# Altium PCB PCB1.PcbDoc
Units mm, origin at the board's own origin, x right, y up, seen from the top; angles counter-clockwise.
Board outline 83.06 x 101.6 mm, 4 copper layers (Top Layer, Layer 1, Layer 2, Bottom Layer), stack 0.603 mm thick; 75 components, 37 nets, 224 pads, 59 vias.
Unrouted connection lines stored in the file: 11.
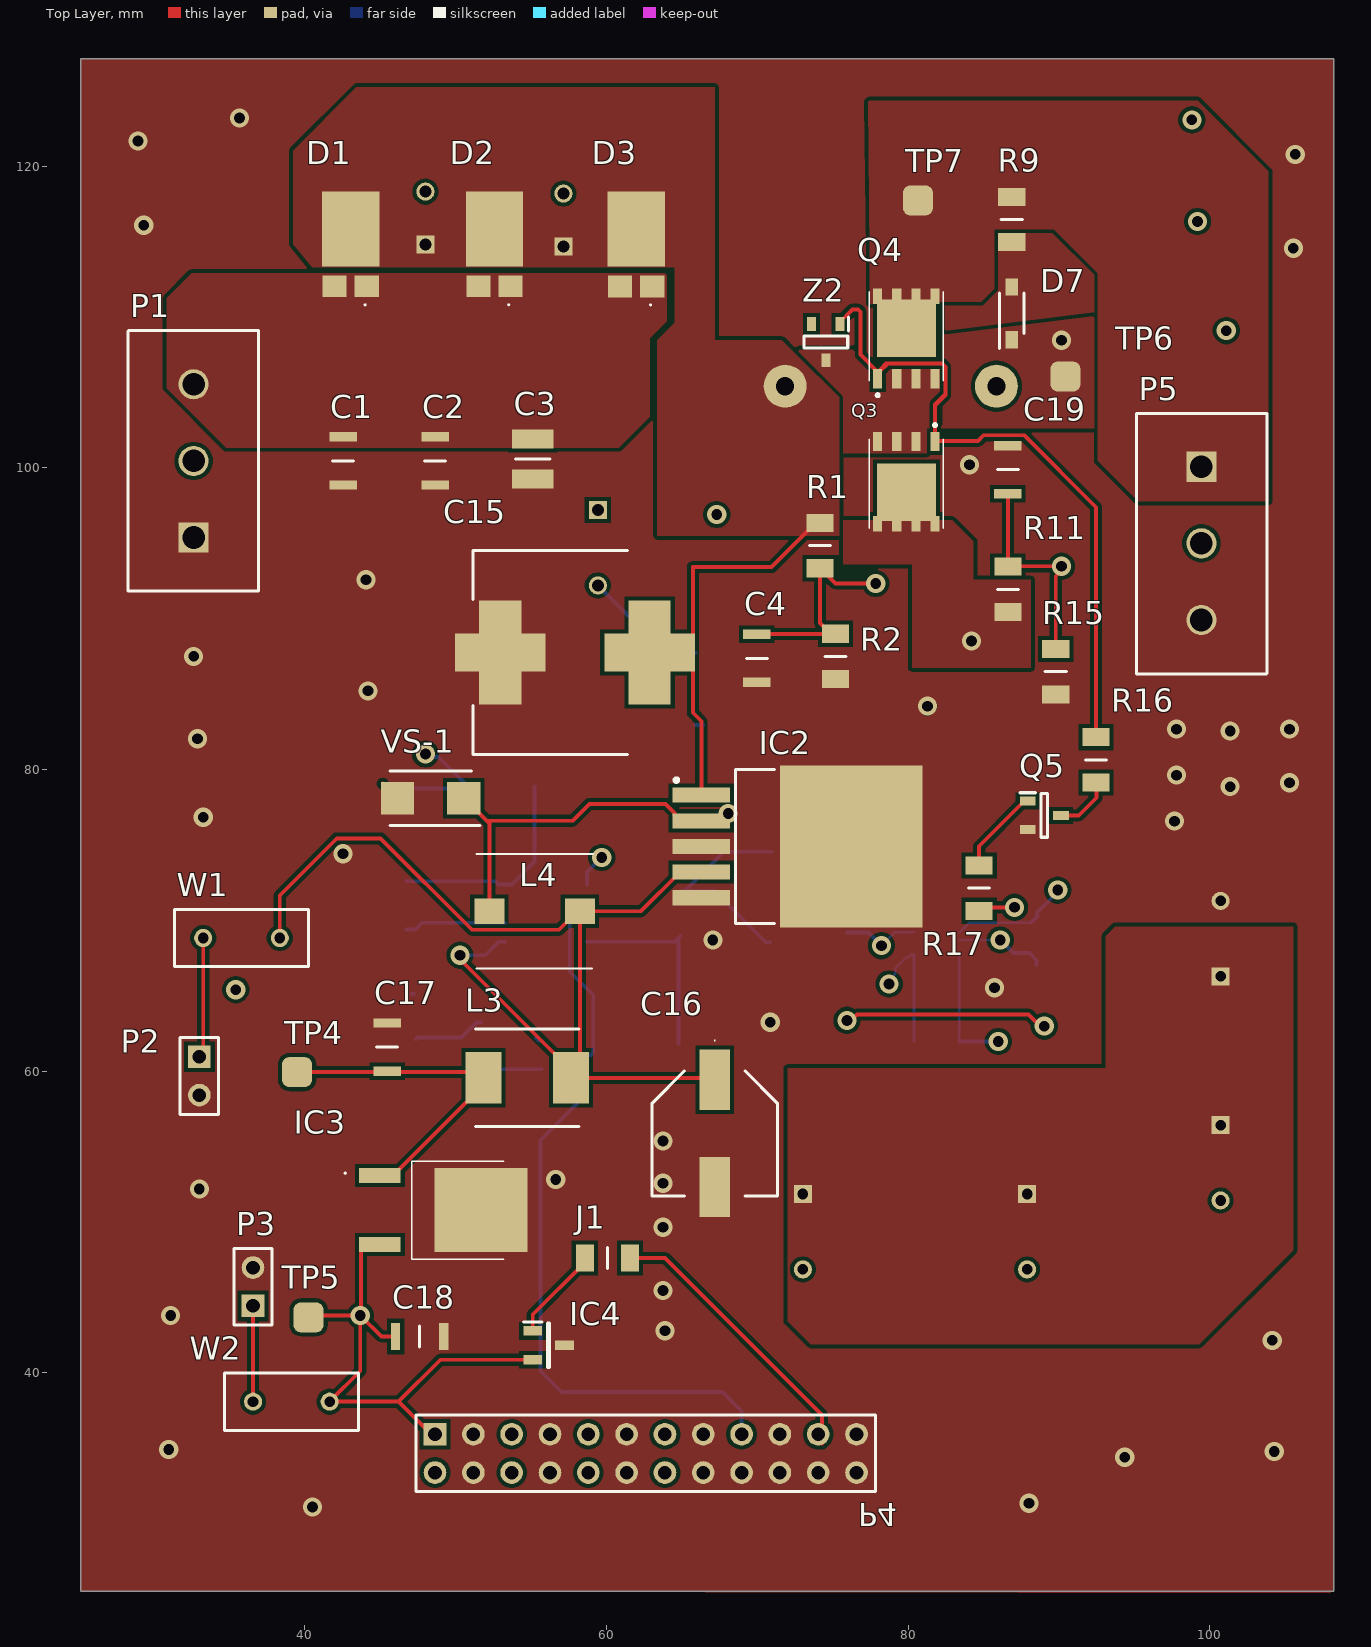
[diagram p0: Top Layer view]
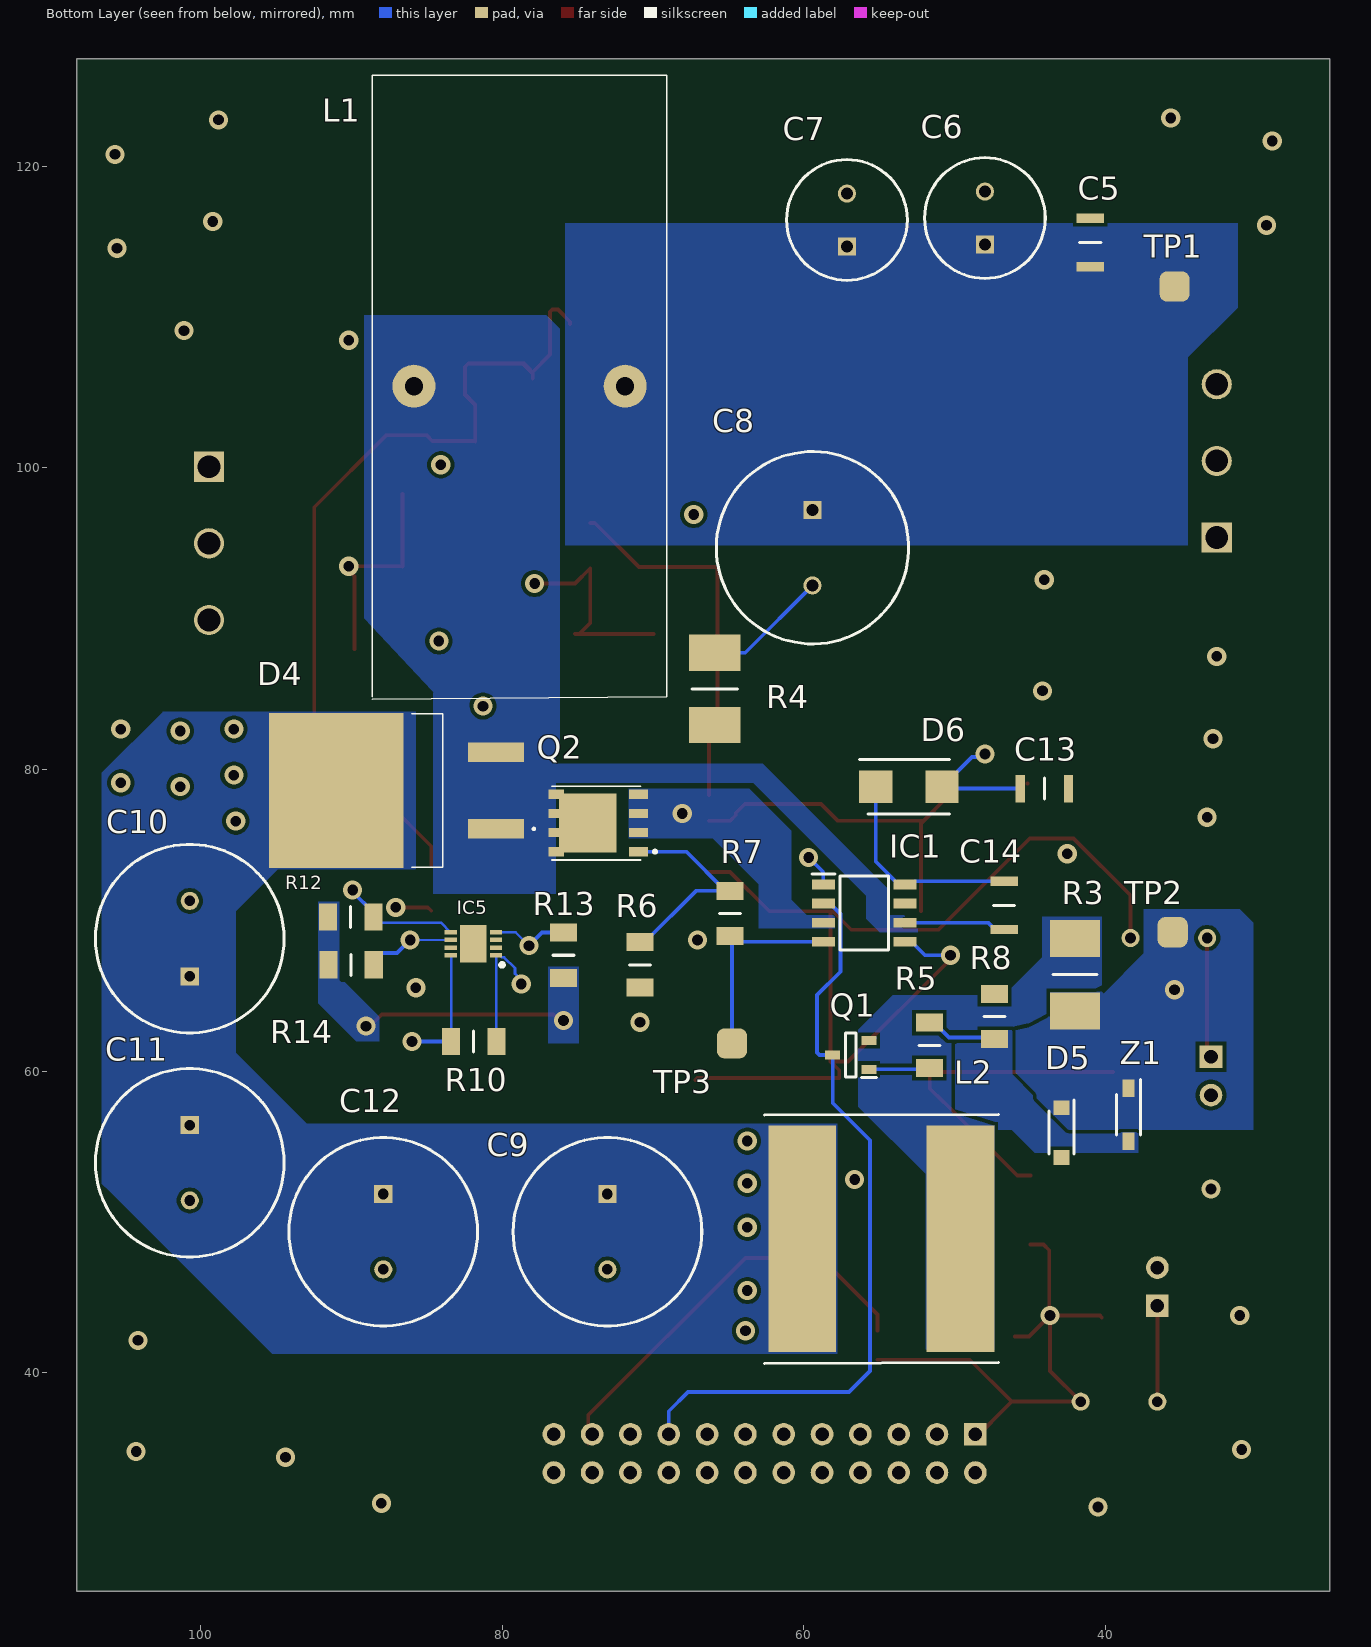
[diagram p1: Bottom Layer view, seen from below]
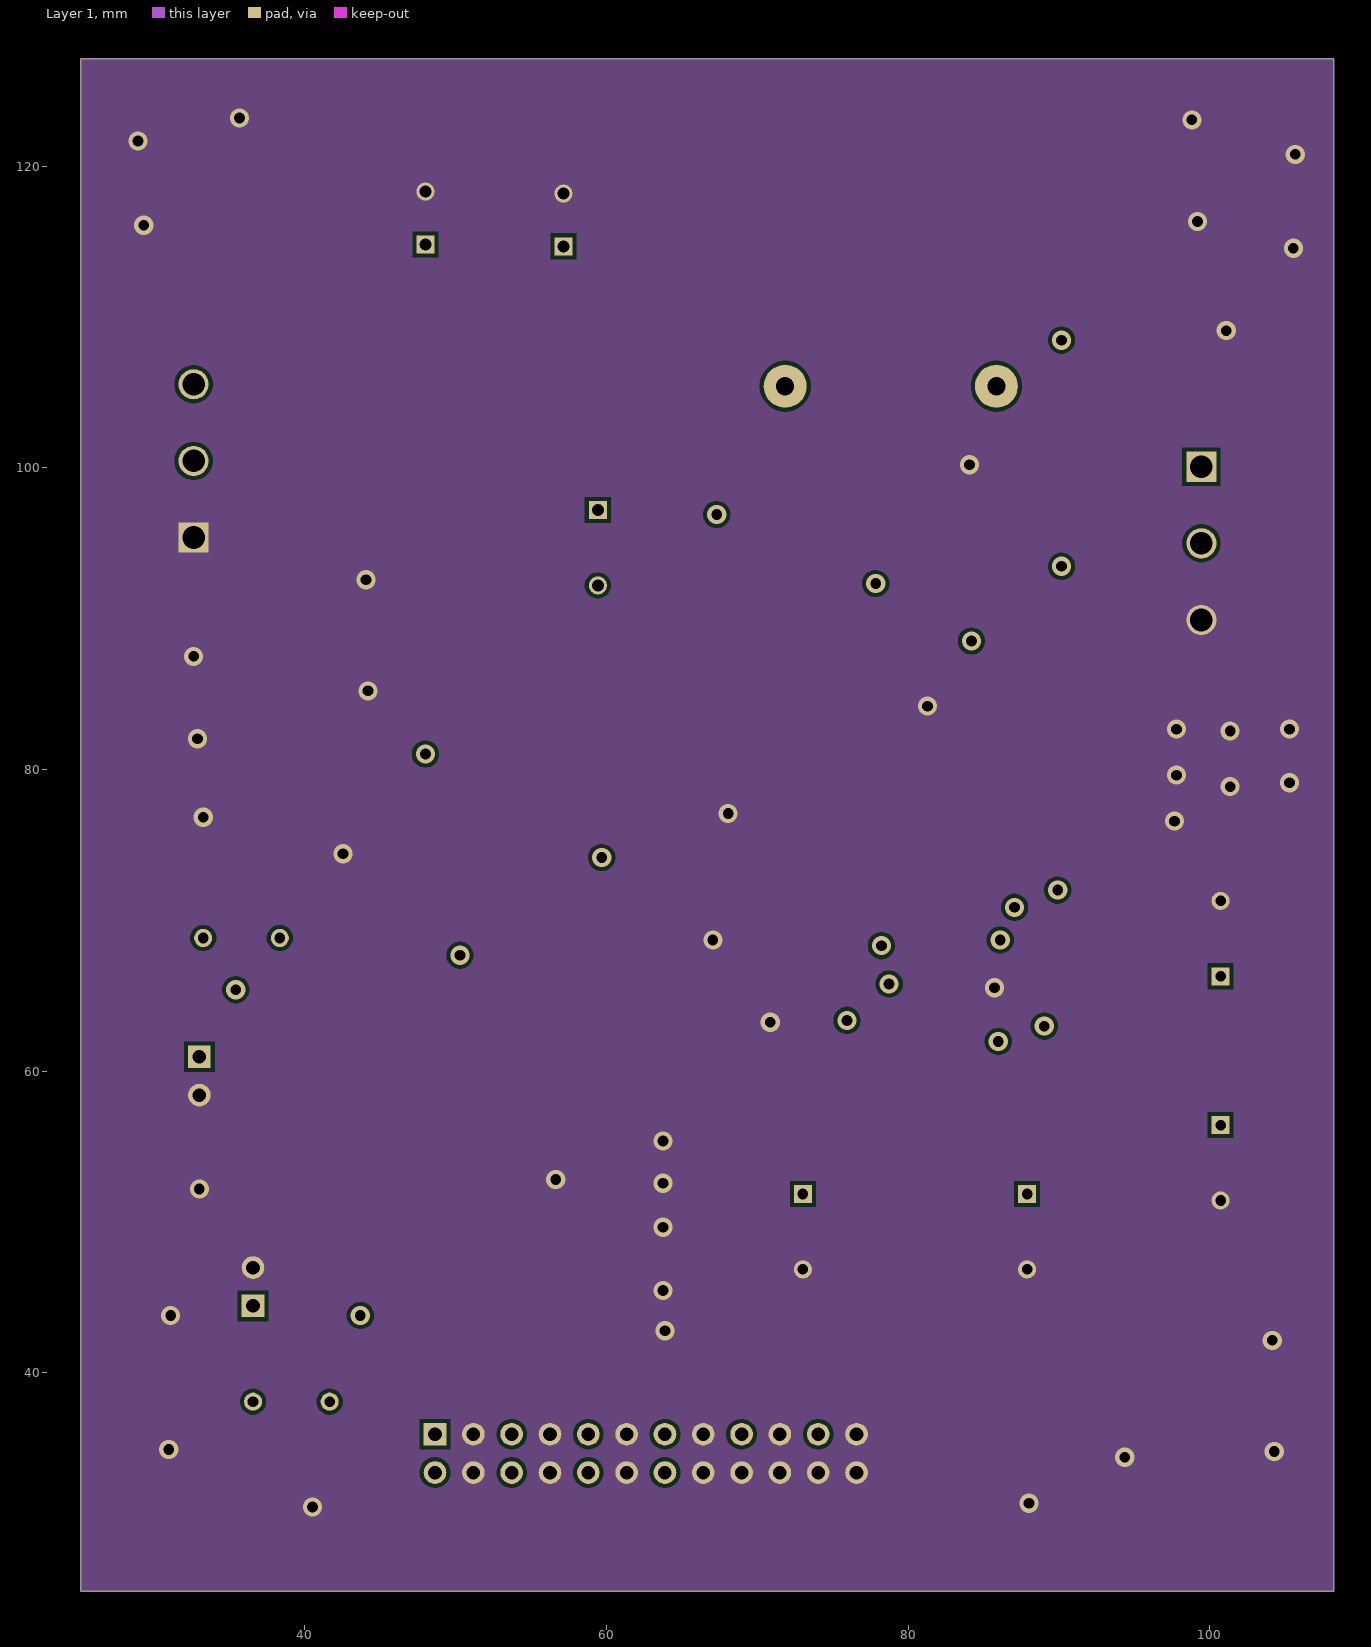
[diagram p2: Layer 1]
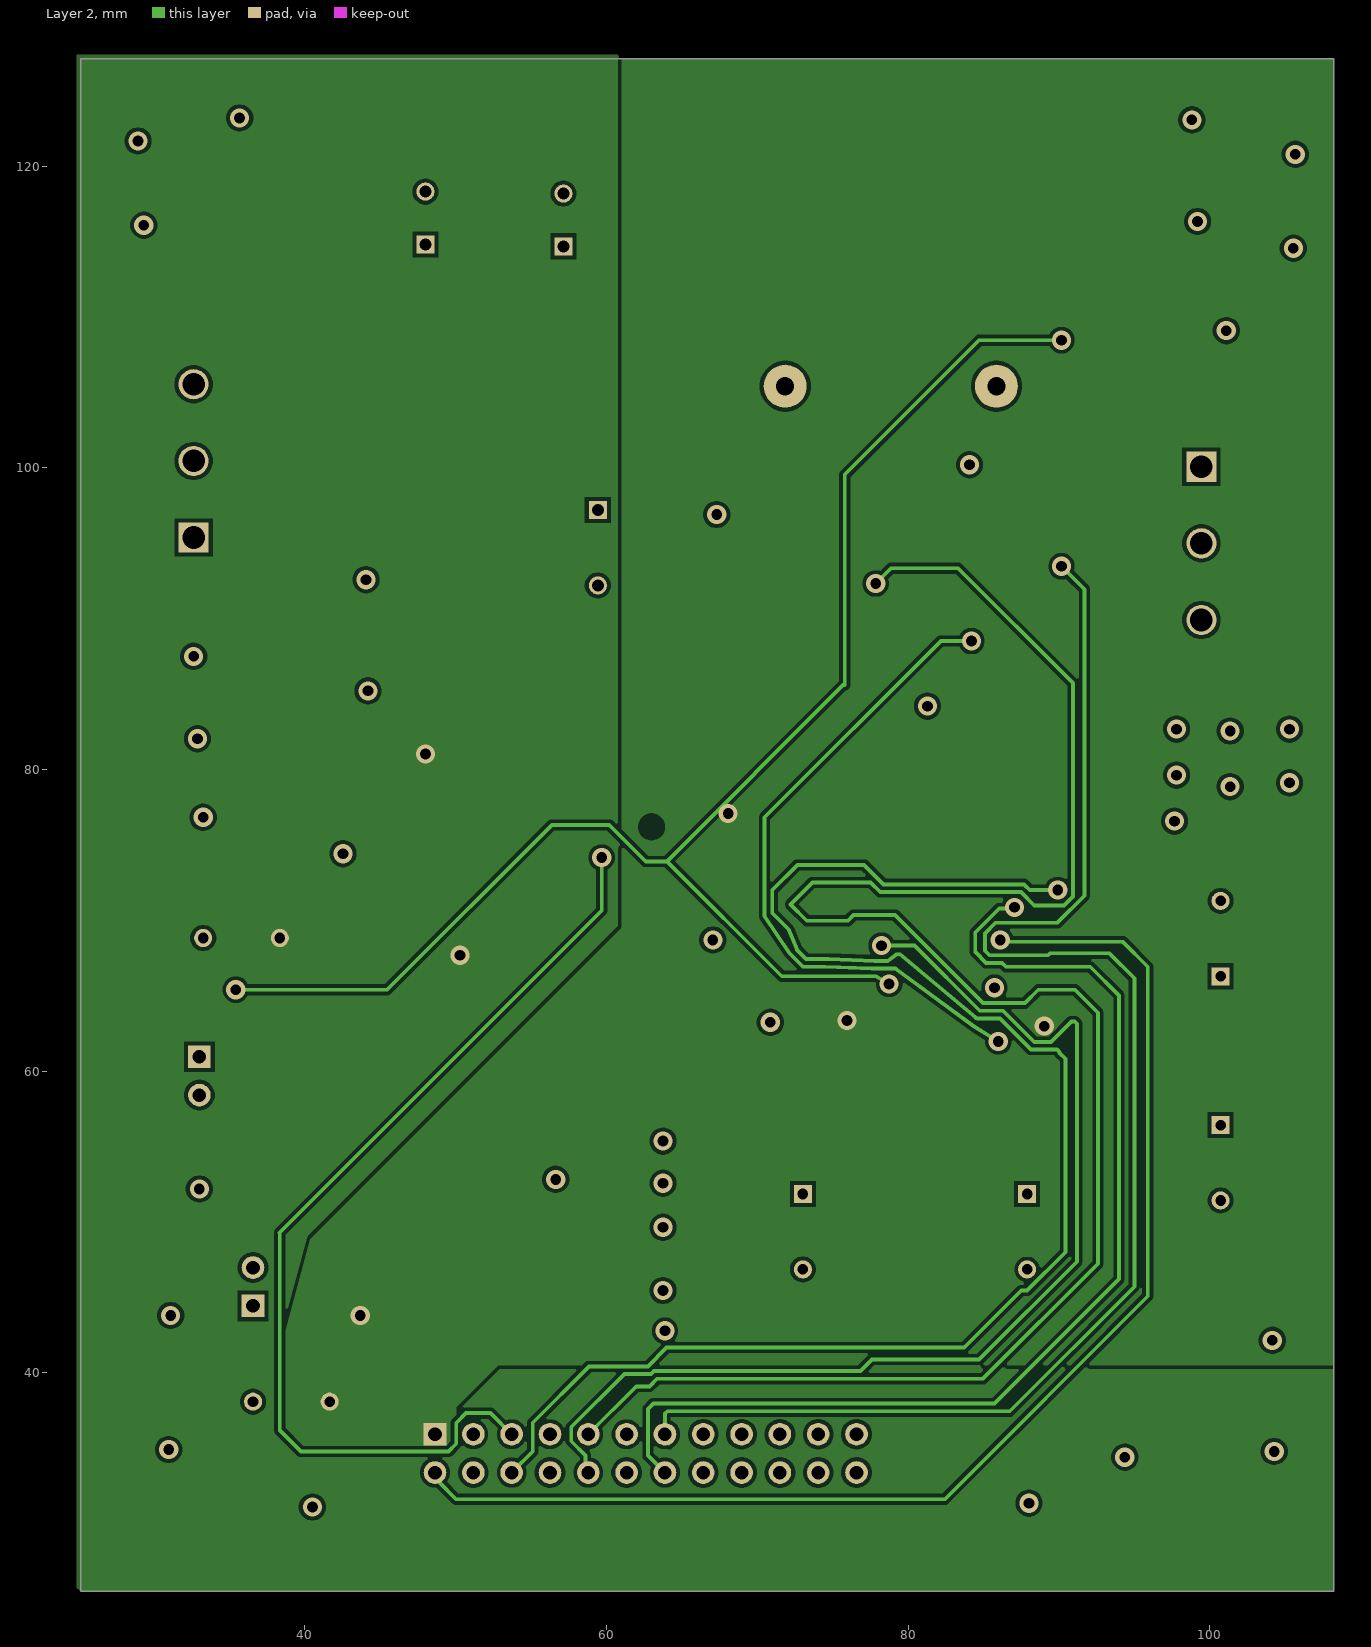
[diagram p3: Layer 2]
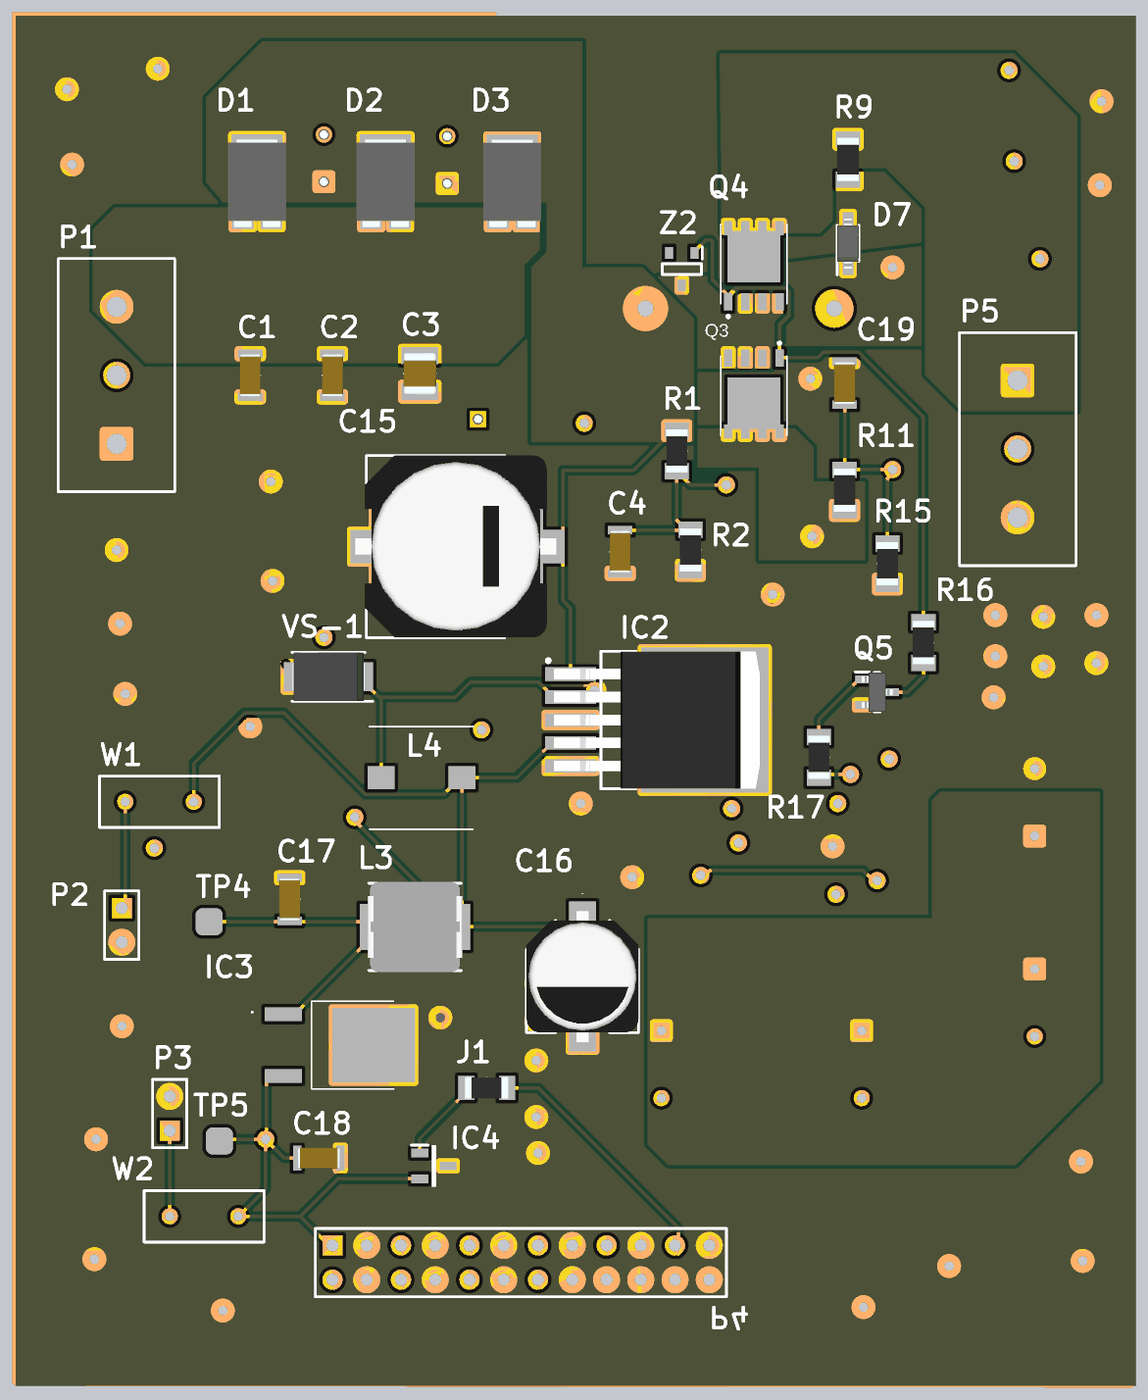
[diagram p4: 3D render of the assembled board from above, using the file's embedded part models]
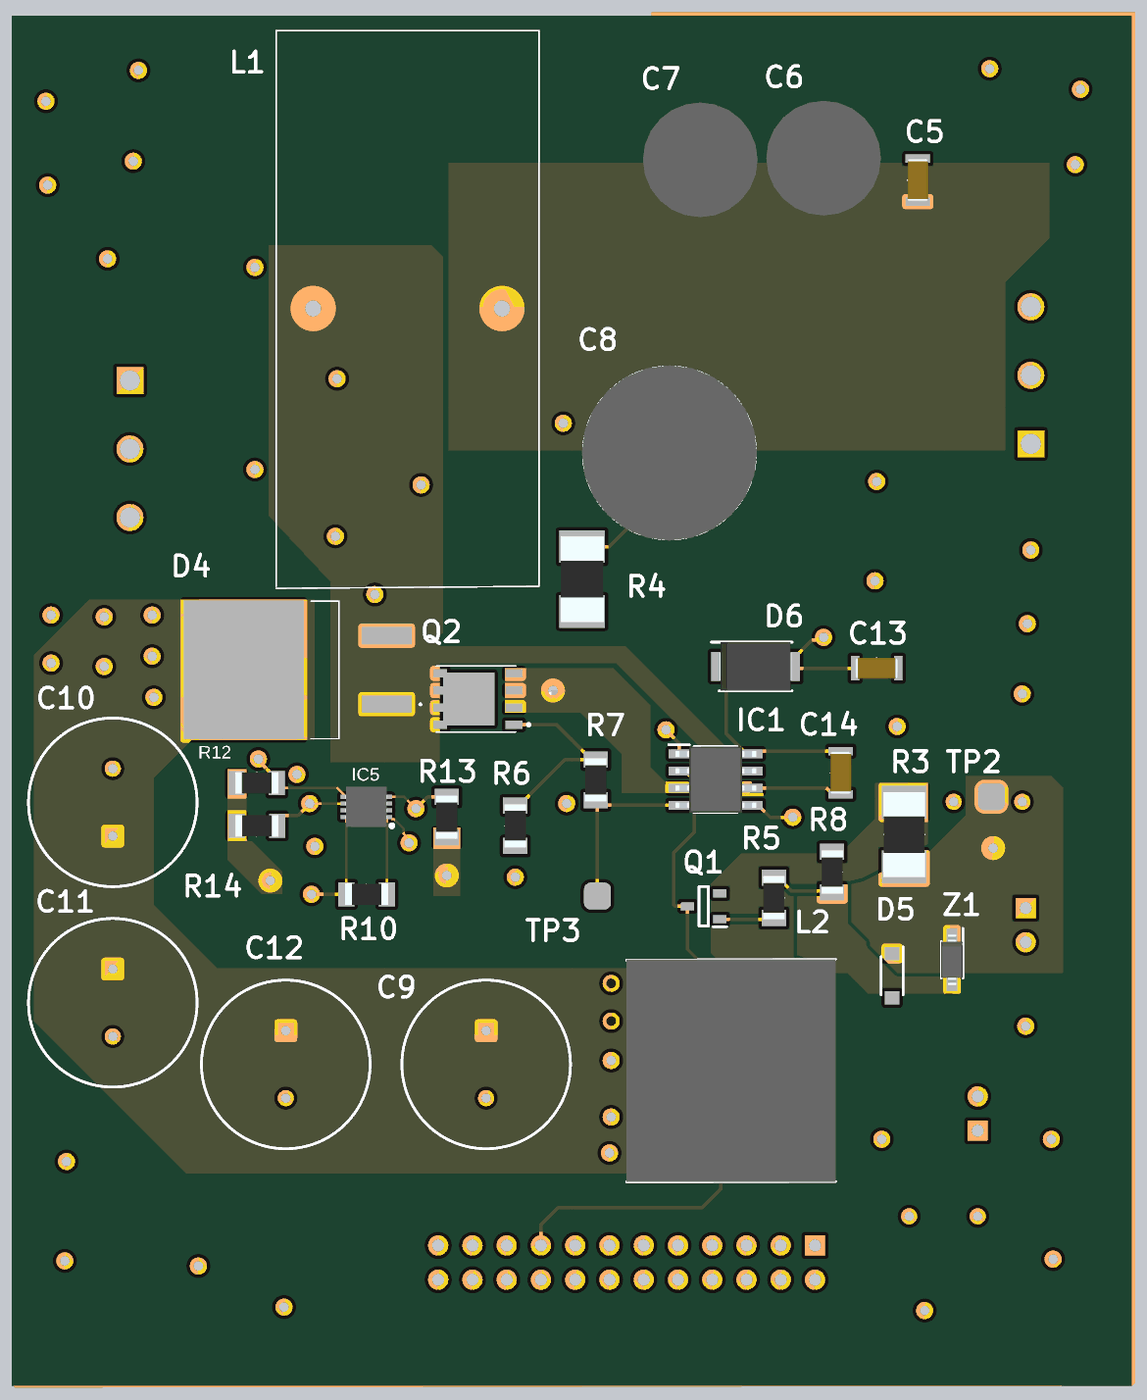
[diagram p5: 3D render of the assembled board from below, using the file's embedded part models]

## Layer stack, top to bottom
Top Solder: solder mask 0.0102, Solder Resist, Dk 3.5
Top Layer: signal copper 0.0356
Dielectric 2: prepreg 0.0711, PP-006, Dk 4.1
Layer 1: signal copper 0.035
Dielectric 1: dielectric 0.32, FR-4, Dk 4.8
Layer 2: signal copper 0.035
Dielectric 3: prepreg 0.0711, PP-006, Dk 4.1
Bottom Layer: signal copper 0.0356
Bottom Solder: solder mask 0.0102, Solder Resist, Dk 3.5

## Board outline
25.146,25.527 25.146,127.127 108.204,127.127 108.204,25.527

## Design rules (kind name [scope] priority, off if disabled: settings)
Clearance [All] p1: gap=0.254 ignorepadtopadclearanceinfootprint=TRUE except(0: Arc-Hole Track-Hole SMDPad-SMDPad SMDPad-Hole THPad-THPad THPad-Hole Via-Hole Fill-Hole Poly-Hole Region-Hole Text-Hole)
Height [All] p1: minheight=0 maxheight=50 prefheight=12.7
MinimumSolderMaskSliver [All] p1: minsoldermaskwidth=0.021
PlaneConnect [All] p1: planeconnectstyle=Direct reliefexpansion=0.508 reliefentries=4 reliefconductorwidth=0.254 reliefairgap=0.254
PolygonConnect [All] p1: connectstyle=Direct reliefconductorwidth=0.254 reliefentries=4 polygonreliefangle="90 Angle" airgapwidth=0.254
RoutingVias [All] p1: holewidth=0.711 width=1.27 viastyle="Through Hole" minholewidth=0.711 minwidth=1.27 maxholewidth=0.711 maxwidth=1.27
SilkToSolderMaskClearance [IsPad] p1: minsilkscreentomaskgap=0.1 clearancetoexposedcopper=TRUE
SolderMaskExpansion [All] p1: expansion=0.254 istentingtop=FALSE
Width Width_1 [All] p1: maxlimit=0.254 minlimit=0.15 preferedwidth=0.254 minimp=50.000000 maximp=50.000000 favimp=50.000000
26 further rules are at their usual default settings.

## Classes and differential pairs
component class U_Power_Supply: C15 C16 C17 C18 IC2 IC3 IC4 J1 L3 L4 P2 P3 TP4 TP5 VS-1 W1 W2
component class U_Output_Stage: C19 D7 IC5 P5 Q3 Q4 Q5 R9 R10 R11 R12 R13 R14 R15 R16 R17 TP6 TP7 Z2
component class U_MCU: P4
component class U_Input_Stage: C1 C2 C3 C4 D1 D2 D3 P1 R1 R2
component class U_Boost_Converter: C5 C6 C7 C8 C9 C10 C11 C12 C13 C14 D4 D5 D6 IC1 L1 L2 Q1 Q2 R3 R4 R5 R6 R7 R8 TP1 TP2 TP3 Z1

## Components (designator, comment, footprint, x,y, rotation, side; value= is the part's Value field where it differs from the comment)
C1 "10nF" CAPC3216X180N 42.545,100.457 r90 top value=100nF
C2 "100µF" CAPC3216X180N 48.641,100.457 r90 top value=10nF
C3 "GRM32EC72A106KE05K" CAPC3225X270N 55.118,100.584 r90 top value=10uF
C4 "220pF" CAPC3216X180N 69.977,87.376 r90 top
C5 "CC1206KKX7R0BB104" CAPC3216X180N 41.021,114.935 r90 bottom value=100nF
C6 "870056174001" 870056174001 48.006,114.808 r90 bottom value=10µF
C7 "870056174001" 870056174001 57.15,114.681 r90 bottom value=10µF
C8 "100ZLJ220M12.5X25" CAPPRD500W60D1275H2700 59.436,97.202 r270 bottom value=220uF
C9 "EGXF251ELL680MK30S" EGXF251ELL680MK30S 73.025,51.863 r270 bottom value=68µF
C10 "EGXF251ELL680MK30S" EGXF251ELL680MK30S 100.711,66.294 r90 bottom value=68µF
C11 "EGXF251ELL680MK30S" EGXF251ELL680MK30S 100.711,56.435 r270 bottom value=68µF
C12 "EGXF251ELL680MK30S" EGXF251ELL680MK30S 87.884,51.863 r270 bottom value=68µF
C13 "100nF" CAPC3216X180N 44.069,78.74 r0 bottom
C14 "330nF" CAPC3216X180N 46.736,70.993 r90 bottom
C15 "EEV-FK1K101V" EEEFK0J332AV 57.912,87.757 r90 top value=100µF
C16 "EEEFK1E331P" EEE0JA471UAP 67.183,55.88 r270 top value=330µF
C17 "C1206C105M5REC7210" CAPC3216X180N 45.466,61.595 r270 top value=1µF
C18 "CC1206KKX7R0BB104" CAPC3216X180N 47.625,42.418 r180 top value=100nF
C19 "220pF" CAPC3216X180N 86.614,99.873 r270 top
D1 "PMEG45U10" PMEG45U10EPDZ 43.053,114.808 r0 top
D2 "PMEG45U10" PMEG45U10EPDZ 52.578,114.808 r0 top
D3 "PMEG45U10" PMEG45U10EPDZ 61.976,114.804 r0 top
D4 "STPS30L60CG-TR" STPS30L60CGTR 88.519,78.613 r90 bottom
D5 "SMF4L60A-Q" SODFL3716X135N 42.926,55.939 r270 bottom
D6 "VS-10BQ060-M3_5BT" DIOM5436X244N 53.045,78.867 r180 bottom
D7 "1N4148W-G3-08" SOD3716X135N 86.868,110.236 r90 top
IC1 "IR7184STRPBF" SOIC127P600X175-8N 56.007,70.485 r180 bottom
IC2 "TL2575HV-12IKTTR" TO170P1524X483-6N 72.694,74.901 r0 top
IC3 "UA78M33CKVURG3" TPS7A6533QKVURQ1 44.989,50.8 r0 top
IC4 "MCP100T-315I_TT" SOT96P237X112-3N 56.168,41.839 r0 top
IC5 "LTC2944CDD#PBF" SON50P300X300X80-9N-D 81.915,68.453 r0 bottom
J1 "MCWR12X000 PTL" RESC3216X75N 60.071,47.625 r0 top value=0
L1 "SHBC20-1R7A0054V" SHBC201R7A0054V 78.852,105.41 r0 bottom value=54uH
L2 "SRP1580CA-2R0M" SRP1510CA100M 54.864,48.895 r90 bottom value=2uH
L3 "22uH" INDPM6965X300N 54.758,59.563 r180 top
L4 "330uH" WE-PD_7332/7345_PLASTIC_BASE54 55.245,70.612 r90 top
P1 "MSTBVA2,5/3-G-5,08" HDR1X3 36.939,91.837 r90 top
P2 "Header 2" HDR1X2 33.02,60.96 r270 top
P3 "Header 2" HDR1X2 36.576,44.45 r90 top
P4 "Header 12X2" HDR2X12 48.641,35.941 r0 top
P5 "MSTBVA2,5/3-G-5,08" HDR1X3 95.141,103.616 r270 top
Q1 "MMBT2222ALT1G" SOT96P237X111-3N 56.896,61.087 r0 bottom
Q2 "SIR120DP-T1-RE3" SI7141DPT1GE3 73.771,76.454 r0 bottom
Q3 "SI7155DP-T1-GE3" SI7141DPT1GE3 79.883,98.933 r270 top
Q4 "SI7155DP-T1-GE3" SI7141DPT1GE3 79.883,108.712 r90 top
Q5 "FMMT493ATA" SOT95P230X110-3N 89.027,76.962 r0 top
R1 "100KΩ" RESC3216X75N 74.168,94.845 r90 top value=100k
R2 "8.2KΩ" RESC3216X75N 75.184,87.503 r90 top value=8.2k
R3 "CRM2512-FX-R100ELF" RESC6331X80N 42.037,66.408 r270 bottom value=100m
R4 "35221R0JT" RESC6432X120N 65.913,85.344 r90 bottom value=1
R5 "100Ω" RESC3216X75N 51.689,61.722 r270 bottom value=100
R6 "MCWR12X4702FTL" RESC3216X75N 70.866,67.056 r90 bottom value=47k
R7 "MCWR12W8R20FTL" RESC3216X75N 64.897,70.461 r90 bottom value=8.2
R8 "1KΩ" RESC3216X75N 47.371,63.627 r270 bottom value=1k
R9 "MCWR12X1002FTL" RESC3216X75N 86.868,116.459 r90 top value=10k
R10 "ERJ8BWFR015V" RESC3216X75N 81.891,61.976 r0 bottom value=0.015
R11 "100KΩ" RESC3216X75N 86.614,91.948 r270 top value=100k
R12 "MCHP06W2F1001T5E" RESC3216X75N 90.043,70.231 r0 bottom value=1k
R13 "MCHP06W2F1001T5E" RESC3216X75N 75.946,67.691 r270 bottom value=1k
R14 "MCHP06W2F1001T5E" RESC3216X75N 90.019,67.056 r0 bottom value=1k
R15 "8.2KΩ" RESC3216X75N 89.789,86.487 r90 top value=8.2k
R16 "MCWR12X1003FTL" RESC3216X75N 92.456,80.645 r90 top value=100k
R17 "MCHP06W2F1001T5E" RESC3216X75N 84.709,72.136 r90 top value=1k
TP1 "test point" "Test point" 27.686,167.894 r180 bottom
TP2 "test point" "Test point" 27.813,125.095 r180 bottom
TP3 "test point" "Test point" 57.023,117.729 r180 bottom
TP4 "test point" "Test point" 47.244,115.824 r0 top
TP5 "test point" "Test point" 48.006,99.568 r0 top
TP6 "test point" "Test point" 98.171,161.925 r0 top
TP7 "test point" "Test point" 88.392,173.609 r0 top
VS-1 "Diode_2" DIOM5436X244N 48.346,78.105 r180 top
W1 "Jumper" RAD-0.2 35.814,68.834 r0 top
W2 "Jumper" RAD-0.2 39.116,38.1 r0 top
Z1 "MMSZ5263BT1G" SOD3716X135N 38.481,57.122 r270 bottom
Z2 "BZX84C12VLFHT116" SOT95P240X115-3N 74.549,108.331 r270 top

## Footprints (in the part's own frame and the unit in brackets; to place one, negate y for a bottom-side part, rotate by r counter-clockwise, add the part's x,y. Pads: shape width x height; smd on the part's side, far side on the other; paste and mask are expansions set on the pad)
870056174001 [mm] "10uF"
  rect 1.2x1.2 hole 0.8: 1(0,0)
  round 1.2 hole 0.8: 2(3.5,0)
  silkscreen extent -2.25,-4 5.75,4, body extent -2.5,-4.25 6,4.25, height 9
CAPC3216X180N [mm]
  rect 0.62x1.82 smd: 1(-1.6,0) 2(1.6,0)
  silkscreen extent 0,-0.7 0,0.7, body extent -1.6,-0.8 1.6,0.8, height 1.8
CAPC3225X270N [mm]
  rect 1.26x2.72 smd: 1(-1.33,0) 2(1.33,0)
  silkscreen extent 0,-1.15 0,1.15, body extent -1.6,-1.25 1.6,1.25, height 2.7
CAPPRD500W60D1275H2700 [mm]
  rect 1.2x1.2 hole 0.8: 1(0,0)
  round 1.2 hole 0.8: 2(5,0)
  silkscreen extent -3.87,-6.38 8.87,6.37, body extent -4,-6.5 9,6.5, height 27
DIOM5436X244N [mm]
  rect 2.2x2.15 smd: 1(-2.2,0) 2(2.2,0)
  silkscreen extent -3.28,-1.81 2.7,1.81, body extent -2.7,-1.81 2.7,1.81, height 2.44
EEE0JA471UAP [mm]
  rect 4x2 smd: 1(-3.55,0) 2(3.55,0)
  silkscreen extent -6.18,-4.15 4.15,4.15, body extent 0,0 0,0
EEEFK0J332AV [mm]
  rect 2.2x2.8 smd: 1(-2.35,-4.95) 1(2.35,-4.95) 2(-2.35,4.95) 2(2.35,4.95)
  rect 2.5x6 smd: 1(0,-4.95) 2(0,4.95)
  silkscreen extent -6.75,-3.5 6.75,6.75, body extent -6.73,-7.32 6.77,7.58, height 13.8
EGXF251ELL680MK30S [mm] "68uF"
  rect 1.2x1.2 hole 0.7: 1(0,0)
  round 1.2 hole 0.7: 2(5,0)
  silkscreen extent -3.75,-6.25 8.75,6.25, body extent -3.71,-6.25 8.79,6.25, height 8
HDR1X2 [mm] "Connector; Header; 2 Position"
  rect 1.5x1.5 hole 0.9: 1(0,0)
  round 1.5 hole 0.9: 2(2.54,0)
  silkscreen extent -1.27,-1.27 3.81,1.27
HDR1X3 [mm] "Connector; Header; 3 Position"
  rect 2x2 hole 1.5: 1(3.54,4.3)
  round 2 hole 1.5: 2(8.62,4.3) 3(13.7,4.3)
  silkscreen extent 0,0 17.27,8.64
HDR2X12 [mm] "Connector; Header; 12x2 Position"
  rect 1.5x1.5 hole 0.9: 1(0,0)
  round 1.5 hole 0.9: 2(0,-2.54) 3(2.54,0) 4(2.54,-2.54) 5(5.08,0) 6(5.08,-2.54) 7(7.62,0) 8(7.62,-2.54) 9(10.16,0) 10(10.16,-2.54) 11(12.7,0) 12(12.7,-2.54) 13(15.24,0) 14(15.24,-2.54) 15(17.78,0) 16(17.78,-2.54) 17(20.32,0) 18(20.32,-2.54) 19(22.86,0) 20(22.86,-2.54) 21(25.4,0) 22(25.4,-2.54) 23(27.94,0) 24(27.94,-2.54)
  silkscreen extent -1.27,-3.81 29.21,1.27
INDPM6965X300N [mm]
  rect 2.4x3.4 smd: 1(-2.9,0) 2(2.9,0)
  silkscreen extent -3.43,-3.23 3.43,3.23, body extent -3.54,-3.33 3.53,3.34, height 2.89
PMEG45U10EPDZ [mm]
  rect 1.6x1.44 smd: 1(1.065,-2.78) 2(-1.065,-2.78)
  rect 3.8x4.96 smd: 3(0,1.02)
  silkscreen extent 0.9,-4.05 1,-3.95, body extent -2.15,-3.36 2.15,3.12, height 0.92
RAD-0.2 [mm] "Radial Cap, Thru-Hole; 2 Leads; 0.2 in Pin Spacing"
  round 1.2 hole 0.7: 1(-2.54,0) 2(2.54,0)
  silkscreen extent -4.44,-1.91 4.44,1.91
RESC3216X75N [mm]
  rect 1.2x1.8 smd: 1(-1.5,0) 2(1.5,0)
  silkscreen extent 0,-0.7 0,0.7, body extent -1.6,-0.8 1.6,0.8, height 0.75
RESC6331X80N [mm]
  rect 2.45x3.3 smd: 1(-2.4,0) 2(2.4,0)
  silkscreen extent 0,-1.45 0,1.45, body extent -3.15,-1.55 3.15,1.55, height 0.8
RESC6432X120N [mm]
  rect 2.4x3.4 smd: 1(-2.4,0) 2(2.4,0)
  silkscreen extent 0,-1.5 0,1.5, body extent -3.17,-1.6 3.17,1.6, height 1.2
SHBC201R7A0054V [mm]
  round 2.85 hole 1.2: 1(-7,0) 2(7,0)
  silkscreen extent -9.75,-20.6 9.75,20.75, body extent -9.78,-20.64 9.78,20.7, height 41.2
SI7141DPT1GE3 [mm]
  rect 1.27x0.61 smd: 1(-2.81,1.905) 2(-2.81,0.635) 3(-2.81,-0.635) 4(-2.81,-1.905)
  rect 3.81x3.91 smd: 5(0.55,0)
  rect 0.32x0.255 smd: 5(2.3,-2.083) 5(2.3,2.083)
  rect 0.71x0.61 smd: 5(2.81,-1.905) 5(2.81,-0.635) 5(2.81,1.905) 7(2.81,0.635)
  silkscreen extent -4,-2.45 2.95,2.45
SOD3716X135N [mm]
  rect 1.15x0.8 smd: 1(-1.75,0) 2(1.75,0)
  silkscreen extent -2.33,-0.8 1.34,0.8, body extent -1.86,-0.8 1.86,0.8, height 1.35
SODFL3716X135N [mm]
  rect 0.98x1.07 smd: 1(-1.65,0) 2(1.65,0)
  silkscreen extent -2.14,-0.82 1.41,0.82, body extent -1.85,-0.82 1.85,0.82, height 1.35
SOIC127P600X175-8N [mm]
  rect 1.525x0.65 smd: 1(-2.712,1.905) 2(-2.712,0.635) 3(-2.712,-0.635) 4(-2.712,-1.905) 5(2.712,-1.905) 6(2.712,-0.635) 7(2.712,0.635) 8(2.712,1.905)
  silkscreen extent -3.48,-2.45 1.6,2.58, body extent -3,-2.45 3,2.45, height 1.75
SON50P300X300X80-9N-D [mm]
  rect 0.8x0.3 smd: 1(-1.5,0.75) 2(-1.5,0.25) 3(-1.5,-0.25) 4(-1.5,-0.75) 5(1.5,-0.75) 6(1.5,-0.25) 7(1.5,0.25) 8(1.5,0.75)
  rect 1.75x2.48 smd: 9(0,0)
  silkscreen extent -2.02,1.28 -1.77,1.52, body extent -1.55,-1.5 1.55,1.5, height 0.8
SOT95P230X110-3N [mm]
  rect 1.05x0.6 smd: 1(-1.1,0.95) 2(-1.1,-0.95) 3(1.1,0)
  silkscreen extent -1.62,-1.45 0.22,1.5, body extent -1.15,-1.45 1.15,1.45, height 1.1
SOT95P240X115-3N [mm]
  rect 0.9x0.6 smd: 1(-1.2,0.95) 2(-1.2,-0.95) 3(1.2,0)
  silkscreen extent -1.65,-1.45 0.4,1.5, body extent -1.2,-1.45 1.2,1.45, height 1.15
SOT96P237X111-3N [mm]
  rect 1x0.6 smd: 1(-1.2,0.955) 2(-1.2,-0.955) 3(1.2,0)
  silkscreen extent -1.7,-1.46 0.35,1.51, body extent -1.18,-1.46 1.18,1.46, height 1.11
SOT96P237X112-3N [mm]
  rect 1.25x0.65 smd: 1(-1.05,0.96) 2(-1.05,-0.96) 3(1.05,0)
  silkscreen extent -1.67,-1.46 0.08,1.54, body extent -1.18,-1.46 1.18,1.46, height 1.12
SRP1510CA100M [mm]
  rect 15x4.5 smd: 1(0,5.25) 2(0,-5.25)
  silkscreen extent -8.25,-7.75 8.25,7.75, body extent -8.25,-7.75 8.25,7.75, height 10.1
STPS30L60CGTR [mm]
  rect 1.3x3.7 smd: 1(-2.54,-8.115) 2(2.54,-8.115)
  rect 10.3x8.9 smd: 3(0,2.485)
  silkscreen extent -5.1,-10.66 5.1,-2.51
"Test point" [mm]
  rrect50% 2x2 smd: 5(-7.747,-55.88)
TO170P1524X483-6N [mm]
  rect 3.8x1 smd: 1(-6.4,3.4) 2(-6.4,1.7) 3(-6.4,0) 4(-6.4,-1.7) 5(-6.4,-3.4)
  rect 9.45x10.75 smd: 6(3.55,0)
  silkscreen extent -8.17,-5.1 -1.55,5.1, body extent -7.65,-5.08 7.62,5.08, height 4.44
TPS7A6533QKVURQ1 [mm]
  rect 2.75x1 smd: 1(0,2.29) 3(0,-2.29)
  rect 6.15x5.55 smd: 2(6.7,0)
  silkscreen extent -2.35,-3.25 8.2,3.25, body extent -5.98,-3.26 4.13,3.26, height 2.31
WE-PD_7332/7345_PLASTIC_BASE54 [mm]
  rect 1.7x2 smd: 1(0,3) 2(0,-3)
  silkscreen extent -3.8,-3.86 3.8,3.86

## Part data
C1 C13: library part CC1206KKX7R0BB104, "Capacitor 100nF", LatestRevisionDate=17-Jul-2002, LatestRevisionNote="Re-released for DXP Platform.", PackageDescription="Radial Cap, Thru-Hole; 2 Leads; 0.3 in Pin Spacing", PackageReference=RAD-0.3, Published=8-Jun-2000, Publisher="Altium Limited", Supplier 1=Farnell
C2: library part C1206C103K1RACTU, "Capacitor 10nF", LatestRevisionDate=17-Jul-2002, LatestRevisionNote="Re-released for DXP Platform.", PackageDescription="Radial Cap, Thru-Hole; 2 Leads; 0.3 in Pin Spacing", PackageReference=RAD-0.3, Published=8-Jun-2000, Publisher="Altium Limited", Supplier 1=Mouser
C3: "Ceramic capacitor 10uF", Manufacturer_Name="Murata Electronics", Mouser Part Number=81-GRM32EC72A106KE5K, Arrow Part Number=GRM32EC72A106KE05K, Arrow Price/Stock=https://www.arrow.com/en/products/grm32ec72a106ke05k/murata-manufacturing?region=nac, Height=2.7mm, Manufacturer_Part_Number=GRM32EC72A106KE05K, Mouser Price/Stock=https://www.mouser.co.uk/ProductDetail/Murata-Electronics/GRM32EC72A106KE05K?qs=rrS6PyfT74e65RehvwNPbw%3D%3D
C4 C19: library part VJ1206A221JXBCW1BC, "Capacitor 220pF", LatestRevisionDate=17-Jul-2002, LatestRevisionNote="Re-released for DXP Platform.", PackageDescription="Radial Cap, Thru-Hole; 2 Leads; 0.3 in Pin Spacing", PackageReference=RAD-0.3, Published=8-Jun-2000, Publisher="Altium Limited", Supplier 1=Mouser
C5 C18: "Capacitor 100nF", LatestRevisionDate=17-Jul-2002, LatestRevisionNote="Re-released for DXP Platform.", PackageDescription="Radial Cap, Thru-Hole; 2 Leads; 0.3 in Pin Spacing", PackageReference=RAD-0.3, Published=8-Jun-2000, Publisher="Altium Limited", Supplier 1=Farnell
C6 C7: "Capacitor Polarised 10uF", Manufacturer_Name=Panasonic, Manufacturer_Part_Number=EEV-FK1K101V, Mouser Part Number=667-EEV-FK1K101V, Datasheet Link=http://industrial.panasonic.com/cdbs/www-data/pdf/RDE0000/ABA0000C1181.pdf, Height=14.3mm, Mouser Price/Stock=https://www.mouser.co.uk/ProductDetail/Panasonic/EEV-FK1K101V?qs=MtOUKumLmnbTFvRMlB7%2FdA%3D%3D
C8: "Capacitor Polarised", Manufacturer_Name=Rubycon, Mouser Part Number=232-100ZLJ220M125X25, Arrow Part Number=100ZLJ220M12.5X25, Arrow Price/Stock=https://www.arrow.com/en/products/100zlj220m12.5x25/rubycon, Datasheet Link=https://componentsearchengine.com/Datasheets/2/100ZLJ220M12.5X25.pdf, Height=27mm, Manufacturer_Part_Number=100ZLJ220M12.5X25, Mouser Price/Stock=https://www.mouser.com/Search/Refine.aspx?Keyword=232-100ZLJ220M125X25
C9 C10 C11 C12: "Capacitor 68uF", Manufacturer_Name=Panasonic, Manufacturer_Part_Number=EEV-FK1K101V, Mouser Part Number=667-EEV-FK1K101V, Datasheet Link=http://industrial.panasonic.com/cdbs/www-data/pdf/RDE0000/ABA0000C1181.pdf, EGXF251ELL680MK30S=68µF, Height=14.3mm, Mouser Price/Stock=https://www.mouser.co.uk/ProductDetail/Panasonic/EEV-FK1K101V?qs=MtOUKumLmnbTFvRMlB7%2FdA%3D%3D
C14: library part C3216X7R2A334K130AA, "Capacitor 330nF", LatestRevisionDate=17-Jul-2002, LatestRevisionNote="Re-released for DXP Platform.", PackageDescription="Radial Cap, Thru-Hole; 2 Leads; 0.3 in Pin Spacing", PackageReference=RAD-0.3, Published=8-Jun-2000, Publisher="Altium Limited", Supplier 1=Mouser
C15: "Capacitor 100uF", Manufacturer_Name=Panasonic, Mouser Part Number=667-EEV-FK1K101V, Datasheet Link=http://industrial.panasonic.com/cdbs/www-data/pdf/RDE0000/ABA0000C1181.pdf, Height=14.3mm, Manufacturer_Part_Number=EEV-FK1K101V, Mouser Price/Stock=https://www.mouser.co.uk/ProductDetail/Panasonic/EEV-FK1K101V?qs=MtOUKumLmnbTFvRMlB7%2FdA%3D%3D, Supplier 1=Mouser
C16: "Capacitor 330uF", Manufacturer_Name=Panasonic, Manufacturer_Part_Number=EEV-FK1K101V, Mouser Part Number=667-EEV-FK1K101V, Datasheet Link=http://industrial.panasonic.com/cdbs/www-data/pdf/RDE0000/ABA0000C1181.pdf, Height=14.3mm, Mouser Price/Stock=https://www.mouser.co.uk/ProductDetail/Panasonic/EEV-FK1K101V?qs=MtOUKumLmnbTFvRMlB7%2FdA%3D%3D, Supplier 1=Mouser
C17: "Capacitor 1uF", LatestRevisionDate=17-Jul-2002, LatestRevisionNote="Re-released for DXP Platform.", PackageDescription="Radial Cap, Thru-Hole; 2 Leads; 0.3 in Pin Spacing", PackageReference=RAD-0.3, Published=8-Jun-2000, Publisher="Altium Limited", Supplier 1=Farnell
D1 D2 D3: library part PMEG45U10EPDZ, "Schottky Diode", Manufacturer_Name=Nexperia, Mouser Part Number=771-PMEG45U10EPDZ, Arrow Part Number=PMEG45U10EPDZ, Arrow Price/Stock=https://www.arrow.com/en/products/pmeg45u10epdz/nexperia, Datasheet Link=https://assets.nexperia.com/documents/data-sheet/PMEG45U10EPD.pdf, Height=0.82mm, Manufacturer_Part_Number=PMEG45U10EPDZ, Mouser Price/Stock=https://www.mouser.co.uk/ProductDetail/Nexperia/PMEG45U10EPDZ?qs=M%2FOdCRO8QQ0v3Dd16sTKSg%3D%3D
D4: "Schottky Diode"
D5: "TVS Diode (Uni-directional)", Manufacturer_Name=Bourns, Mouser Part Number=652-SMF4L60A-Q, Datasheet Link=https://bourns.com/docs/product-datasheets/smf4l-q.pdf, Height=1.35mm, Manufacturer_Part_Number=SMF4L60A-Q, Mouser Price/Stock=https://www.mouser.co.uk/ProductDetail/Bourns/SMF4L60A-Q?qs=iLbezkQI%252BsjmazDMS%252BOglQ%3D%3D
D6: "Diode", Arrow Part Number=VS-10BQ060-M3/5BT, Manufacturer_Name=Vishay, Mouser Part Number=78-VS-10BQ060-M35BT, Arrow Price/Stock=https://www.arrow.com/en/products/vs-10bq060-m35bt/vishay, Datasheet Link=https://componentsearchengine.com/Datasheets/1/VS-10BQ060-M3_5BT.pdf, Height=2.44mm, Manufacturer_Part_Number=VS-10BQ060-M3/5BT, Mouser Price/Stock=https://www.mouser.co.uk/ProductDetail/Vishay-Semiconductors/VS-10BQ060-M3-5BT/?qs=asPD7ZL2j3Xpjq4X%2F1O06Q%3D%3D
D7: "Diode", Manufacturer_Name=Vishay, Mouser Part Number=78-1N4148W-G3-08, Arrow Part Number=1N4148W-G3-08, Arrow Price/Stock=https://www.arrow.com/en/products/1n4148w-g3-08/vishay, Datasheet Link=https://componentsearchengine.com/Datasheets/1/1N4148W-G3-08.pdf, Height=1.35mm, Manufacturer_Part_Number=1N4148W-G3-08, Mouser Price/Stock=https://www.mouser.co.uk/ProductDetail/Vishay-Semiconductors/1N4148W-G3-08?qs=uS%252BVSIFnvp46StDBB15x4Q%3D%3D
IC1: "Integrated Circuit", Manufacturer_Name=Infineon, Mouser Part Number=942-IR7184STRPBF, Arrow Part Number=IR7184STRPBF, Arrow Price/Stock=https://www.arrow.com/en/products/ir7184strpbf/infineon-technologies-ag, Datasheet Link=https://componentsearchengine.com/Datasheets/1/IR7184STRPBF.pdf, Height=1.75mm, Manufacturer_Part_Number=IR7184STRPBF, Mouser Price/Stock=https://www.mouser.com/Search/Refine.aspx?Keyword=942-IR7184STRPBF
IC2: "Integrated Circuit", Manufacturer_Name="Texas Instruments", Mouser Part Number=595-TL2575HV-12IKTTR, Arrow Part Number=TL2575HV-12IKTTR, Arrow Price/Stock=https://www.arrow.com/en/products/tl2575hv-12ikttr/texas-instruments?region=nac, Datasheet Link=http://www.ti.com/lit/ds/symlink/tl2575-15.pdf, Height=5.13mm, Manufacturer_Part_Number=TL2575HV-12IKTTR, Mouser Price/Stock=https://www.mouser.co.uk/ProductDetail/Texas-Instruments/TL2575HV-12IKTTR?qs=EnLMdcWnKADDmW7d51Om1g%3D%3D
IC3: "Integrated Circuit", Manufacturer_Name="Texas Instruments", Mouser Part Number=595-UA78M33CKVURG3, Arrow Part Number=UA78M33CKVURG3, Arrow Price/Stock=https://www.arrow.com/en/products/ua78m33ckvurg3/texas-instruments, Datasheet Link=https://www.ti.com/lit/gpn/ua78m?HQS=ti-null-null-sf-df-pf-sep-wwe&DCM=yes, Height=2.52mm, Manufacturer_Part_Number=UA78M33CKVURG3, Mouser Price/Stock=https://www.mouser.co.uk/ProductDetail/Texas-Instruments/UA78M33CKVURG3?qs=0O%2FZFlpUpJXrDg4gfD1Q2g%3D%3D
IC4: "Integrated Circuit", Arrow Part Number=MCP100T-315I/TT, Manufacturer_Name=Microchip, Mouser Part Number=579-MCP100T-315I/TT, Arrow Price/Stock=https://www.arrow.com/en/products/mcp100t-315itt/microchip-technology?region=nac, Datasheet Link=http://docs-emea.rs-online.com/webdocs/0d03/0900766b80d034b8.pdf, Height=1.12mm, Manufacturer_Part_Number=MCP100T-315I/TT, Mouser Price/Stock=https://www.mouser.co.uk/ProductDetail/Microchip-Technology/MCP100T-315I-TT?qs=cQYLKLPzRJnnE4Sa6znIFg%3D%3D
IC5: "Integrated Circuit", Manufacturer_Name="Analog Devices", Mouser Part Number=584-LTC2944CDDPBF, Arrow Part Number=LTC2944CDD#PBF, Arrow Price/Stock=https://www.arrow.com/en/products/ltc2944cddpbf/analog-devices, Datasheet Link=https://www.analog.com/media/en/technical-documentation/data-sheets/2944fa.pdf, Height=0.8mm, Manufacturer_Part_Number=LTC2944CDD#PBF, Mouser Price/Stock=https://www.mouser.co.uk/ProductDetail/Analog-Devices/LTC2944CDDPBF?qs=u4fy%2FsgLU9Omd44j%252B6inEQ%3D%3D
J1: "Zero ohm resistor"
L1: "Inductor 54uH"
L2: "Inductor 2uH", Arrow Part Number=SRP1038C-100M, Manufacturer_Name=Bourns, Mouser Part Number=652-SRP1038C-100M, Arrow Price/Stock=https://www.arrow.com/en/products/srp1038c-100m/bourns, Datasheet Link=https://www.bourns.com/data/global/pdfs/SRP1038A.pdf, Height=4mm, Manufacturer_Part_Number=SRP1038C-100M, Mouser Price/Stock=https://www.mouser.co.uk/ProductDetail/Bourns/SRP1038C-100M?qs=PzGy0jfpSMvAa%252BP05u%252BK2w%3D%3D
L3: library part IHLP2525CZER220M11, "Inductor 22uH", Manufacturer_Name=Vishay, Mouser Part Number=70-IHLP2525CZER220, Arrow Part Number=IHLP2525CZER220M11, Arrow Price/Stock=https://www.arrow.com/en/products/ihlp2525czer220m11/vishay?region=europe, Datasheet Link=https://componentsearchengine.com/Datasheets/1/IHLP2525CZER220M11.pdf, Height=3mm, Manufacturer_Part_Number=IHLP2525CZER220M11, Mouser Price/Stock=https://www.mouser.co.uk/ProductDetail/Vishay-Dale/IHLP2525CZER220M11?qs=sy7P%252B1cA09hqmhD2Kelr6g%3D%3D
L4: library part 7447789233, "Inductor 330uH", Manufacturer_Name="Wurth Elektronik", Manufacturer_Part_Number=7447789233
P1 P5: "Header, 3-Pin", LatestRevisionDate=17-Jul-2002, LatestRevisionNote="Re-released for DXP Platform.", Publisher="Altium Limited"
P2 P3: "Header, 2-Pin", LatestRevisionDate=17-Jul-2002, LatestRevisionNote="Re-released for DXP Platform.", Publisher="Altium Limited"
P4: "Header, 12-Pin, Dual row", LatestRevisionDate=17-Jul-2002, LatestRevisionNote="Re-released for DXP Platform.", Publisher="Altium Limited"
Q1: "NPN transistor", Manufacturer_Name="ON Semiconductor", Mouser Part Number=863-MMBT2222ALT1G, Arrow Part Number=MMBT2222ALT1G, Arrow Price/Stock=https://www.arrow.com/en/products/mmbt2222alt1g/on-semiconductor, Datasheet Link=http://www.onsemi.com/pub/Collateral/MMBT2222LT1-D.PDF, Height=1.11mm, Manufacturer_Part_Number=MMBT2222ALT1G, Mouser Price/Stock=https://www.mouser.co.uk/ProductDetail/onsemi/MMBT2222ALT1G?qs=HVbQlW5zcXWwnD7Jokybqg%3D%3D
Q2: "MOSFET (N-Channel)", Manufacturer_Name=Vishay, Mouser Part Number=78-SIR120DP-T1-RE3, Arrow Part Number=SIR120DP-T1-RE3, Arrow Price/Stock=https://www.arrow.com/en/products/sir120dp-t1-re3/vishay, Datasheet Link=http://www.vishay.com/docs/79731/sir120dp.pdf, Manufacturer_Part_Number=SIR120DP-T1-RE3, Mouser Price/Stock=https://www.mouser.co.uk/ProductDetail/Vishay-Semiconductors/SIR120DP-T1-RE3?qs=UkDUCjYnTB3xEXzKpvDZuA%3D%3D
Q3 Q4: "MOSFET (P-Channel)"
Q5: "Transistor BJT PNP", Manufacturer_Name="Diodes Inc.", Mouser Part Number=522-FMMT493ATA, Arrow Part Number=FMMT493ATA, Arrow Price/Stock=https://www.arrow.com/en/products/fmmt493ata/diodes-incorporated, Datasheet Link=https://datasheet.datasheetarchive.com/originals/distributors/Datasheets_SAMA/813f9dcbae48594177f25ecf9038d058.pdf, Height=1.1mm, Manufacturer_Part_Number=FMMT493ATA, Mouser Price/Stock=https://www.mouser.co.uk/ProductDetail/Diodes-Incorporated/FMMT493ATA?qs=GBLSl2AkiruoD9OMdIH%252BaQ%3D%3D
R1 R11: library part MCWR12X1003FTL, "Resistor 100k", LatestRevisionDate=29-May-2009, LatestRevisionNote="IPC-7351 Footprint Added.", PackageDescription="Chip Resistor", PackageReference=J1-0603, Published=8-Jun-2000, Publisher="Altium Limited", Supplier 1=Farnell
R2 R15: library part CRGCQ1206F8K2, "Resistor 8.2k", LatestRevisionDate=29-May-2009, LatestRevisionNote="IPC-7351 Footprint Added.", PackageDescription="Chip Resistor", PackageReference=J1-0603, Published=8-Jun-2000, Publisher="Altium Limited", Supplier 1=Mouser
R3: "Resistor 100m", LatestRevisionDate=29-May-2009, LatestRevisionNote="IPC-7351 Footprint Added.", PackageDescription="Chip Resistor", PackageReference=J1-0603, Published=8-Jun-2000, Publisher="Altium Limited", Supplier 1=Mouser
R4: "Resistor 1 3W", LatestRevisionDate=29-May-2009, LatestRevisionNote="IPC-7351 Footprint Added.", PackageDescription="Chip Resistor", PackageReference=J1-0603, Published=8-Jun-2000, Publisher="Altium Limited", Supplier 1=Farnell
R5: library part MCWR12X1000FTL, "Resistor 100", LatestRevisionDate=29-May-2009, LatestRevisionNote="IPC-7351 Footprint Added.", PackageDescription="Chip Resistor", PackageReference=J1-0603, Published=8-Jun-2000, Publisher="Altium Limited", Supplier 1=Farnell
R6: "Resistor 47k", LatestRevisionDate=29-May-2009, LatestRevisionNote="IPC-7351 Footprint Added.", PackageDescription="Chip Resistor", PackageReference=J1-0603, Published=8-Jun-2000, Publisher="Altium Limited", supplier=farnell
R7: "Resistor 8.2", LatestRevisionDate=29-May-2009, LatestRevisionNote="IPC-7351 Footprint Added.", PackageDescription="Chip Resistor", PackageReference=J1-0603, Published=8-Jun-2000, Publisher="Altium Limited", Supplier 1=Farnell
R8: library part MCHP06W2F1001T5E, "Resistor 1k", LatestRevisionDate=29-May-2009, LatestRevisionNote="IPC-7351 Footprint Added.", PackageDescription="Chip Resistor", PackageReference=J1-0603, Published=8-Jun-2000, Publisher="Altium Limited", supplier=farnell, Supplier 1=Farnell
R9: "Resistor 10k", LatestRevisionDate=29-May-2009, LatestRevisionNote="IPC-7351 Footprint Added.", PackageDescription="Chip Resistor", PackageReference=J1-0603, Published=8-Jun-2000, Publisher="Altium Limited", Supplier 1=Farnell
R10: "Shunt resistor 0.015", LatestRevisionDate=17-Jul-2002, LatestRevisionNote="Re-released for DXP Platform.", PackageDescription="Axial Device, Thru-Hole; 2 Leads; 0.3 in Pin Spacing", PackageReference=AXIAL-0.3, Published=8-Jun-2000, Publisher="Altium Limited", Supplier 1=Mouser
R12 R13 R14 R17: "Resistor 1k", LatestRevisionDate=29-May-2009, LatestRevisionNote="IPC-7351 Footprint Added.", PackageDescription="Chip Resistor", PackageReference=J1-0603, Published=8-Jun-2000, Publisher="Altium Limited", supplier=farnell, Supplier 1=Farnell
R16: "Resistor 100k", LatestRevisionDate=29-May-2009, LatestRevisionNote="IPC-7351 Footprint Added.", PackageDescription="Chip Resistor", PackageReference=J1-0603, Published=8-Jun-2000, Publisher="Altium Limited", Supplier 1=Farnell
VS-1: "Schottky Rectifier / VS-10BQ060-M3/5BT", ComponentLink1Description="Manufacturer Link", ComponentLink1URL=http://www.irf.com/, ComponentLink2Description=Datasheet, ComponentLink2URL=http://www.irf.com/product-info/datasheets/data/10tq.pdf, DatasheetVersion=PD-2.057B, LatestRevisionDate=17-Jul-2002, LatestRevisionNote="Re-released for DXP Platform.", Note="Terminal 2 is the TAB and is electrically connected to the cathode", PackageDescription="TO, Thru-Hole, Vertical, Heatsink Mounted; 3 In-Line Leads (1 Absent); Pitch 2.54 mm", PackageReference=TO-220AC, PackageVersion=Feb-1998, Published=8-Jun-2000, Publisher="Altium Limited"
W1 W2: "Jumper Wire", LatestRevisionDate=17-Jul-2002, LatestRevisionNote="Re-released for DXP Platform.", PackageDescription="Radial Cap, Thru-Hole; 2 Leads; 0.2 in Pin Spacing", PackageReference=RAD-0.2, Published=24-Mar-1999, Publisher="Altium Limited"
Z1: "Zener Diode", Manufacturer_Name="ON Semiconductor", Mouser Part Number=863-MMSZ5263BT1G, Arrow Part Number=MMSZ5263BT1G, Arrow Price/Stock=https://www.arrow.com/en/products/mmsz5263bt1g/on-semiconductor?region=nac, Datasheet Link=http://www.onsemi.com/pub/Collateral/MMSZ5221BT1-D.PDF, Height=1.35mm, Manufacturer_Part_Number=MMSZ5263BT1G, Mouser Price/Stock=https://www.mouser.co.uk/ProductDetail/onsemi/MMSZ5263BT1G?qs=ZpPixqFcBtxaamSEBIiIIg%3D%3D
Z2: "Zener Diode"

## Via types
v1: diameter 1.27, hole 0.711, Top Layer to Bottom Layer, 59 vias

## Nets (pads, with @x,y where several pads share a name; then routed paths per layer and width w, separated by ;. In a path a pad name is that pad's centre, name@x,y a point inside that pad or via, vN(x,y) a via of type N, cw(c..) or ccw(c..) an arc to the next point about the centre after c; other vN are vias at no path point)
+3V3: C18.2 IC3.3 IC4.2 P4.1 R12.2 R13.2 R14.2 TP5.5 W2.2 | length 50.6
  Top Layer w0.254: TP5.5 40.386,43.815 v1(43.688,43.815) ; IC3.3 44.114,48.51 43.741,48.137 43.741,43.868 v1(43.688,43.815) ; C18.2 45.085,42.418 v1(43.688,43.815) ; P4.1@48.895,35.433 46.228,38.1 ; IC4.2 49.007,40.879 46.228,38.1 ; v1(75.946,63.373) 76.221,63.373 76.602,63.754 87.99,63.754 88.752,62.992 v1(89.027,62.992) ; v1(43.688,43.815) 43.688,40.132 W2.2 46.228,38.1
+12: C13.2 C16.1 D6.2 IC1.5 IC2.4 L3.1 L4.2 W1.2 | length 80.7
  Top Layer w0.254: W1.2 38.354,71.668 42.124,75.438 45.03,75.438 51.087,69.381 56.864,69.381 58.095,70.612 L4.2 ; v1(50.292,67.691) 50.292,67.429 57.071,60.65 L3.1@58.245,60.65 ; IC2.4 64.894,73.201 62.305,70.612 L4.2 ; C16.1 67.05,59.563 L3.1 57.658,60.063 L3.1@58.245,60.65 ; L3.1@58.245,60.65 L4.2
  Bottom Layer w0.254: C13.2 50.718,78.74 D6.2 50.82,78.867 48.855,80.832 48.2,80.832 v1(48.006,81.026) ; v1(50.292,67.691) 51.968,67.691 52.857,68.58 IC1.5
GND: C1.1 C2.1 C3.1 C4.1 C5.2 C6.2 C7.2 C9.2 C10.2 C11.2 C12.2 C13.1 C15.2 C16.2 C17.1 C18.1 C19.1 D5.2 IC1.3 IC2.3 IC2.5 IC2.6 IC3.2 IC4.3 IC5.2 IC5.3 IC5.7 IC5.9 P1.1 P2.2 P3.2 P4.3 P4.4 P4.7 P4.8 P4.11 P4.12 P4.15 P4.16 P4.18 P4.19 P4.20 P4.22 P4.23 P4.24 P5.3 Q1.2 Q2.2 Q2.3 Q2.4 Q5.2 R2.1 R4.1 R6.1 R8.1 R15.1 VS-1.2 | length 2.2
  Top Layer w0.254: v1(44.196,85.217) v1@44.323,85.344 ; VS-1.2@45.173,79.053 VS-1.2@45.173,79.078 ; v1@81.28,83.926 v1(81.28,84.201) v1@81.555,84.201 ; v1(84.074,100.203) v1@84.268,100.397
  Bottom Layer w0.254: R8.1@47.071,65.127 47.221,65.127 R8.1@47.245,65.151 ; Q1.2@55.323,62.215 55.496,62.042 Q1.2 ; R4.1 R4.1@66.413,82.944
  other v1: 40.513,31.115 88.011,31.369 94.361,34.417 104.267,34.798 30.988,34.925 104.14,42.164 63.881,42.799 31.115,43.815 63.754,45.466 63.754,49.657 33.02,52.197 63.754,52.578 56.642,52.832 63.754,55.372 70.866,63.246 85.725,65.532 67.056,68.707 42.545,74.422 97.663,76.581 33.274,76.835 68.072,77.089 101.346,78.867 105.283,79.121 97.79,79.629 32.893,82.042 101.346,82.55 97.79,82.677 105.283,82.677 32.639,87.503 44.069,92.583 101.092,109.093 105.537,114.554 29.337,116.078 99.187,116.332 105.664,120.777 28.956,121.666 98.806,123.063 35.687,123.19
NetC1_2: C1.2 C2.2 C3.2 D1.1 D1.2 D2.1 D2.2 D3.1 D3.2 P1.3
NetC4_2: C4.2 P4.9 R1.1 R2.2 | length 144.8
  Top Layer w0.254: C4.2 75.157,88.976 R2.2 74.884,89.003 74.168,89.719 R1.1 75.184,92.329 v1(77.851,92.329)
  Layer 2 w0.254: P4.9 61.976,39.116 62.865,39.116 63.373,39.624 84.963,39.624 92.583,47.244 92.583,63.881 91.059,65.405 88.626,65.405 87.737,64.516 84.963,64.516 79.121,70.358 76.39,70.358 76.009,69.977 73.279,69.977 72.2,71.056 73.66,72.517 77.514,72.517 78.149,71.882 87.475,71.882 88.364,70.993 90.337,70.993 90.932,71.588 90.932,85.725 83.312,93.345 78.867,93.345 v1(77.851,92.329)
NetC5_1: C5.1 C6.1 C7.1 C8.1 C15.1 D1.3 D2.3 D3.3 IC2.1 L1.1 R1.2 TP1.5 | length 25.2
  Top Layer w0.254: D2.3@53.086,115.955 D2.3@53.213,115.828 ; 65.732,89.408 65.732,83.76 66.294,83.198 IC2.1 ; 65.732,89.531 65.732,93.418 70.941,93.418 73.868,96.345 R1.2
  Bottom Layer w0.254: C6.1 C6.1@48.133,114.681
NetC8_2: C8.2 R4.2 | length 8.3
  Bottom Layer w0.254: C8.2 63.894,87.744 R4.2
NetC9_1: C9.1 C10.1 C11.1 C12.1 D4.3 L2.1
NetC14_1: C14.1 D4.1 D4.2 IC1.6 L1.2 Q2.5 Q2.7 | length 6.7
  Bottom Layer w0.254: C14.1 47.336,69.393 47.793,69.85 IC1.6
NetC14_2: C14.2 D6.1 IC1.8 | length 14.2
  Bottom Layer w0.254: C14.2 52.654,72.593 52.857,72.39 IC1.8 53.732,72.39 55.245,73.903 D6.1
NetC17_2: C17.2 IC3.1 L3.2 TP4.5 | length 22.2
  Top Layer w0.254: TP4.5 45.085,59.944 51.477,59.944 51.668,59.753 51.668,58.872 50.785,57.99 50.764,57.99 45.864,53.09 IC3.1
NetC19_2: C19.2 P4.13 R11.1 R15.2 | length 112.7
  Top Layer w0.254: C19.2 R11.1 86.638,93.472 v1(90.17,93.472) 90.17,93.197 89.789,92.816 R15.2
  Layer 2 w0.254: P4.13 63.881,37.316 64.03,37.465 86.741,37.465 94.996,45.72 94.996,66.167 93.345,67.818 89.408,67.818 89.281,67.691 85.384,67.691 85.09,67.985 85.09,69.128 85.812,69.85 89.912,69.85 91.694,71.632 91.694,91.948 v1(90.17,93.472) ; P4.13@64.135,35.306 P4.13@64.325,35.496
NetD5_1: D5.1 D7.1 IC5.1 R3.2 R10.1 TP2.5 TP6.5 Z1.1 | length 109.3
  Layer 2 w0.254: v1(35.433,65.405) 45.466,65.405 56.388,76.327 60.193,76.327 62.606,73.914 64.008,73.914 ; v1(78.74,65.786) 77.87,66.294 71.628,66.294 64.008,73.914 ; v1(90.17,108.458) 84.709,108.458 75.797,99.546 75.797,85.598 75.692,85.598 64.008,73.914
  Bottom Layer w0.17: v1@78.74,66.061 79.155,66.476 79.155,66.836 79.874,67.555 80.017,67.555 IC5.1@80.165,67.703 ; R10.1 IC5.1@80.391,67.703
  Bottom Layer w0.18: IC5.1@80.165,67.703 IC5.1
  Bottom Layer w0.254: v1(78.74,65.786) v1@78.74,66.061
NetD7_2: D7.2 R9.1
NetIC1_1: IC1.1 P4.5 | length 67.4
  Layer 2 w0.254: P4.5 52.324,37.338 50.695,37.338 50.05,36.693 50.05,35.311 49.537,34.798 39.751,34.798 38.354,36.195 38.354,49.276 38.332,49.298 59.69,70.656 v1(59.69,74.168)
  Bottom Layer w0.254: IC1.1 58.719,73.197 v1(59.69,74.168)
NetIC1_2: IC1.2 P4.17 Q1.3 | length 50.3
  Bottom Layer w0.254: IC1.2 58.282,71.12 57.576,70.414 57.576,66.6 59.126,65.05 59.126,61.236 58.977,61.087 Q1.3 58.096,57.898 55.626,55.428 55.626,40.132 57.023,38.735 67.691,38.735 68.961,37.465 P4.17
NetIC1_4: IC1.4 R7.1 TP3.5 | length 13.3
  Bottom Layer w0.254: IC1.4 64.516,68.58 R7.1@64.77,68.834 ; TP3.5 R7.1@64.77,68.834 ; R7.1 R7.1@64.77,68.834
NetIC1_7: IC1.7
NetIC2_2: IC2.2 L4.1 VS-1.1 | length 23.4
  Top Layer w0.254: VS-1.1 50.571,78.105 52.075,76.601 ; L4.1 52.245,76.431 52.075,76.601 ; IC2.2 64.894,76.601 64.521,76.974 64.521,77.124 63.921,77.724 58.877,77.724 57.754,76.601 52.075,76.601
NetIC4_1: IC4.1 J1.1 | length 6.3
  Top Layer w0.254: IC4.1 55.118,43.872 58.571,47.325 J1.1
NetIC5_4: IC5.4 P4.10 R13.1 | length 78.7
  Layer 2 w0.254: P4.10 58.611,33.591 58.611,34.532 57.67,35.473 57.67,36.409 61.191,39.931 62.961,39.931 63.163,40.132 76.835,40.132 77.597,40.894 84.709,40.894 91.186,47.371 91.186,63.146 91.037,63.295 90.827,63.295 89.478,61.946 88.357,61.946 86.295,64.008 84.753,64.008 80.435,68.326 v1(78.232,68.326)
  Bottom Layer w0.16: v1(78.232,68.326) 79.109,69.203 IC5.4
  Bottom Layer w0.254: R13.1 77.367,69.191 v1(78.232,68.326)
NetIC5_5: IC5.5 P4.6 R12.1 | length 110.3
  Layer 2 w0.254: P4.6 55.118,34.798 55.118,36.703 58.854,40.439 62.751,40.439 63.994,41.682 83.719,41.682 87.503,45.466 87.884,45.466 90.424,48.006 90.424,60.832 90.043,61.213 ccw(c89.791,61.184) 89.791,61.438 88.146,61.438 86.084,63.5 84.634,63.5 cw(c84.634,63.754) 84.471,63.559 79.442,67.759 79.245,67.759 78.653,67.31 77.811,67.31 74.7,67.437 73.239,67.437 72.644,68.032 72.083,69.395 71.935,69.543 70.993,70.485 70.993,72.009 72.666,73.682 77.067,73.682 78.359,72.39 87.685,72.39 88.066,72.009 v1(89.916,72.009)
  Bottom Layer w0.17: IC5.5 84.062,69.85 R12.1@88.162,69.85
  Bottom Layer w0.254: R12.1@88.162,69.85 R12.1 88.543,70.531 89.916,71.904 v1(89.916,72.009)
NetIC5_6: IC5.6 P4.2 R14.1 | length 91.4
  Layer 2 w0.254: P4.2@48.895,32.766 50.026,31.635 82.435,31.635 95.885,45.085 95.885,66.929 94.234,68.58 86.233,68.58 v1(86.106,68.707)
  Bottom Layer w0.16: IC5.6 v1@86.106,68.703
  Bottom Layer w0.254: v1(86.106,68.707) 86.984,67.829 88.046,67.829 88.519,67.356 R14.1
NetIC5_8: IC5.8 Q3.5 Q3.7 R10.2 R11.2 | length 52.2
  Layer 2 w0.254: v1(84.201,88.519) 82.169,88.519 70.485,76.835 70.485,70.275 72.136,67.822 73.029,66.929 74.49,66.929 77.601,66.802 79.161,66.802 84.347,62.982 v1(85.979,61.976)
  Bottom Layer w0.17: R10.2 IC5.8@83.391,67.679
  Bottom Layer w0.18: IC5.8@83.391,67.679 IC5.8
  Bottom Layer w0.254: R10.2 v1(85.979,61.976)
NetJ1_2: J1.2 P4.21 | length 18.9
  Top Layer w0.254: J1.2 63.881,47.625 74.295,37.211 P4.21@74.295,35.306
NetL2_2: L2.2 R3.1 | length 0.4
  Bottom Layer w0.254: L2.2 L2.2@49.9,49.181
NetP2_1: P2.1 W1.1 | length 8
  Top Layer w0.254: P2.1 33.274,61.214 W1.1
NetP3_1: P3.1 W2.1 | length 6.3
  Top Layer w0.254: W2.1 P3.1
NetP4_14: P4.14 R17.1 | length 76.5
  Top Layer w0.254: R17.1 84.939,70.866 v1(87.054,70.866)
  Layer 2 w0.254: P4.14 62.75,34.532 62.75,37.604 63.119,37.973 85.725,37.973 93.98,46.228 93.98,65.024 92.075,66.929 86.483,66.929 86.229,67.183 85.173,67.183 84.455,67.901 84.455,69.211 86.038,70.794 86.982,70.794 v1(87.054,70.866) ; P4.14@63.945,32.956 P4.14@63.945,33.401
NetP5_1: P5.1 Q4.5 Q4.7 R9.2 TP7.5
NetQ1_1: Q1.1 R5.2 | length 4
  Bottom Layer w0.254: R5.2 51.779,60.132 Q1.1
NetQ2_1: Q2.1 R6.2 R7.2 | length 14.2
  Bottom Layer w0.254: R7.2 R7.2@65.197,71.961 ; R6.2 70.566,68.556 67.161,71.961 R7.2@65.197,71.961 ; Q2.1 67.785,74.549 R7.2@65.197,71.961
NetQ3_1: Q3.1 Q4.1 R16.2 Z2.1 | length 48.5
  Top Layer w0.254: Z2.1 75.499,109.681 76.308,110.49 76.686,110.49 76.835,110.341 76.835,107.502 77.978,106.359 Q4.1@78.105,106.359 ; Q4.1 77.978,106.232 Q4.1@78.105,106.359 ; 78.537,106.918 78.156,106.537 Q4.1@78.156,106.41 ; Q3.1 Q3.1@81.788,101.785 ; R16.2 92.456,97.39 87.682,102.164 85.013,102.164 84.634,101.785 Q3.1@81.788,101.785 ; Q4.1@78.105,106.359 Q4.1@78.156,106.41 ; Q4.1@78.156,106.41 78.664,106.918 82.251,106.918 82.474,106.695 ; Q3.1@81.788,101.785 81.788,104.13 ; 81.788,104.13 81.788,104.214 82.474,104.9 82.474,106.695 ; 81.788,104.13 82.474,104.816 82.474,106.695
NetQ3_2: Q3.2 Q3.3 Q3.4 Q4.2 Q4.3 Q4.4 Z2.3
NetQ5_1: Q5.1 R17.2 | length 5.7
  Top Layer w0.254: R17.2 84.709,74.919 87.702,77.912 Q5.1
NetQ5_3: Q5.3 R16.1 | length 3.9
  Top Layer w0.254: Q5.3 91.313,76.962 92.478,78.127 92.478,79.123 R16.1
NetR5_1: R5.1 R8.2 Z1.2 | length 4.8
  Bottom Layer w0.254: R8.2 47.474,62.23 50.397,62.23 51.389,63.222 R5.1
pads on no net: P1.2 P5.2 Z2.2
copper on no net: | length 0.3
  Top Layer w0.254: v1(67.31,96.901) v1@67.504,97.095

## Polygon pours and split planes (outlines as drawn)
GND on Top Layer "GND_L01_P040" (solid, pour order 40): 25.146,25.527 107.95,25.4 108.204,25.654 108.204,127.127 25.146,127.127 25.146,127
NetD5_1 on Top Layer "NETD5_1_L01_P035" (solid, pour order 35): 82.296,109.093 89.789,110.617 92.583,110.871 92.837,110.617 92.837,102.616 82.042,102.616 82.296,102.87
NetQ3_2 on Top Layer "NETQ3_2_L01_P030" (solid, pour order 30): 74.168,107.696 74.295,107.823 76.327,107.823 77.597,106.553 77.597,105.283 78.359,105.283 78.359,105.791 78.359,106.299 78.359,106.68 82.169,106.807 82.296,106.68 82.296,105.029 81.471,104.203 81.534,104.14 81.534,102.489 81.407,102.489 81.407,100.965 77.597,100.965 75.438,100.965 75.438,104.648 72.263,107.823 73.914,107.823 74.168,107.823
NetP5_1 on Top Layer "NETP5_1_L01_P031" (solid, pour order 31): 81.407,110.998 84.836,110.998 85.725,111.887 85.725,115.824 89.662,115.824 92.583,112.903 92.583,100.457 95.25,97.79 95.504,97.79 103.886,97.79 103.886,119.634 99.187,124.333 86.36,124.333 81.153,124.333 77.343,124.333 77.47,114.3 77.47,112.776 77.47,110.744 77.597,110.871 81.407,110.871
NetIC5_8 on Top Layer "NETIC5_8_L01_P032" (solid, pour order 32): 75.692,96.52 75.692,93.599 80.264,93.599 80.264,86.741 88.138,86.741 88.138,92.583 84.328,92.583 84.328,95.123 82.931,96.52
NetC5_1 on Top Layer "NETC5_1_L01_P020" (solid, pour order 20): 63.373,95.504 64.135,95.504 64.897,95.504 75.438,95.504 75.438,104.648 71.628,108.458 66.167,108.458 63.373,103.505
NetC9_1 on Top Layer "NETC9_1_L01_P036" (solid, pour order 36): 93.091,60.198 93.091,68.961 93.726,69.596 105.537,69.596 105.537,48.133 99.314,41.91 73.533,41.91 72.009,43.434 72.009,60.198
NetD7_2 on Top Layer "NETD7_2_L01_P034" (solid, pour order 34): 82.423,109.085 92.837,110.371 92.837,116.586 82.423,116.586 82.296,116.459 82.423,116.332
NetC5_1 on Top Layer "NETC5_1_L01_P004" (solid, pour order 4): 63.373,101.092 63.373,108.458 64.516,109.601 64.516,113.284 64.389,113.284 40.513,113.284 39.243,114.808 39.243,121.031 43.434,125.222 67.183,125.222 67.183,101.219 67.056,101.092
NetC1_2 on Top Layer "NETC1_2_L01_P003" (solid, pour order 3): 30.861,111.252 32.512,112.903 63.881,112.903 64.008,112.776 64.008,109.728 62.865,108.585 62.865,103.378 60.833,101.346 34.798,101.346 30.861,105.283
NetR5_1 on Bottom Layer "NETR5_1_L04_P043" (solid, pour order 43): 46.217,62.981 49.078,62.981 50.228,61.831 50.228,57.277 49.403,57.277 48.26,56.134 46.228,56.134 44.704,54.61 37.846,54.61 37.846,56.115 37.827,56.134 42.545,56.134 46.21,59.799 46.21,62.974
NetL2_2 on Bottom Layer "NETL2_2_L04_P028" (solid, pour order 28): 51.943,41.402 51.816,41.529 47.371,41.529 47.371,56.388 50.228,57.277 50.228,62.738 45.999,62.738 40.259,65.707 40.259,70.231 44.196,70.231 44.196,67.564 46.736,65.024 54.102,65.024 56.388,62.738 56.388,57.658 51.943,53.213
NetD5_1 on Bottom Layer "NETD5_1_L04_P029" (solid, pour order 29): 43.688,65.278 40.259,65.278 40.132,65.151 37.465,67.818 37.465,70.739 31.115,70.739 30.226,69.85 30.226,56.134 42.545,56.134 46.21,59.799 46.21,63.627 43.688,63.627 43.688,65.405
NetC5_1 on Bottom Layer "NETC5_1_L04_P037" (solid, pour order 37): 75.819,116.205 42.799,116.205 40.259,116.205 31.242,116.205 31.242,110.617 34.544,107.315 34.544,94.869 39.116,94.869 39.37,94.869 39.624,94.869 75.819,94.869
NetC14_1 on Bottom Layer "NETC14_1_L04_P026" (solid, pour order 26): 52.451,70.231 52.578,70.358 54.356,70.358 54.356,72.009 62.738,80.391 77.47,80.391 77.47,78.867 77.47,71.755 76.454,71.755 76.454,79.121 63.373,79.121 55.88,71.628 55.88,70.104 54.991,69.215 52.451,69.215 52.451,70.358
NetC14_1 on Bottom Layer "NETC14_1_L04_P008" (solid, pour order 8): 84.582,71.755 76.454,71.755 76.454,72.39 76.454,81.466 84.582,85.217
NetC9_1 on Bottom Layer "NETC9_1_L04_P021" (solid, pour order 21): 85.725,83.82 85.725,73.406 94.869,73.406 97.663,70.612 97.663,61.214 92.964,56.515 57.785,56.515 57.785,41.275 95.25,41.275 106.553,52.578 106.553,79.756 102.489,83.82
NetC14_1 on Bottom Layer "NETC14_1_L04_P018" (solid, pour order 18): 76.327,81.28 76.2,81.407 76.2,109.22 77.089,110.109 89.154,110.109 89.154,90.043 81.661,82.042
+3V3 on Bottom Layer "+3V3_L04_P016" (solid, pour order 16): 90.805,71.247 92.202,71.247 92.202,64.516 89.662,61.976 88.138,61.976 88.138,63.627 90.424,65.913 90.678,65.913 90.805,66.04
+3V3 on Bottom Layer "+3V3_L04_P015" (solid, pour order 15): 74.93,66.929 76.962,66.929 76.962,61.849 74.93,61.849
GND on Bottom Layer "GND_L04_P011" (solid, pour order 11): 71.628,78.74 71.628,78.613 71.628,75.438 66.04,75.438 62.992,72.39 62.992,69.469 57.912,69.469 57.912,70.358 59.817,70.358 60.833,71.374 60.833,75.946 63.627,78.74
+12 on Layer 2 "+12_L03_P024" (solid, pour order 24): 62.357,127.381 24.892,127.381 24.892,25.781 25.146,25.527 108.204,25.527 108.204,44.069 62.357,44.805
+3V3 on Layer 2 "+3V3_L03_P023" (solid, pour order 23): 108.204,127.127 61.023,127.127 61.023,69.532 40.386,48.895 38.735,42.799 38.735,35.941 40.386,34.29 50.038,34.29 50.038,37.719 52.832,40.513 108.204,40.513 108.204,77.216
GND on Layer 1 "GND_L02_P007" (solid, pour order 7): 25.146,127.127 25.146,25.527 108.204,25.527 108.204,127.127